# Altium PCB PCB.PcbDoc
Units mil, origin at the board's own origin, x right, y up, seen from the top; angles counter-clockwise.
Board outline 6000 x 4000 mil, 2 copper layers (Top Layer, Bottom Layer); 6 components, 5 nets, 24 pads, 0 vias.
Unrouted connection lines stored in the file: 7.
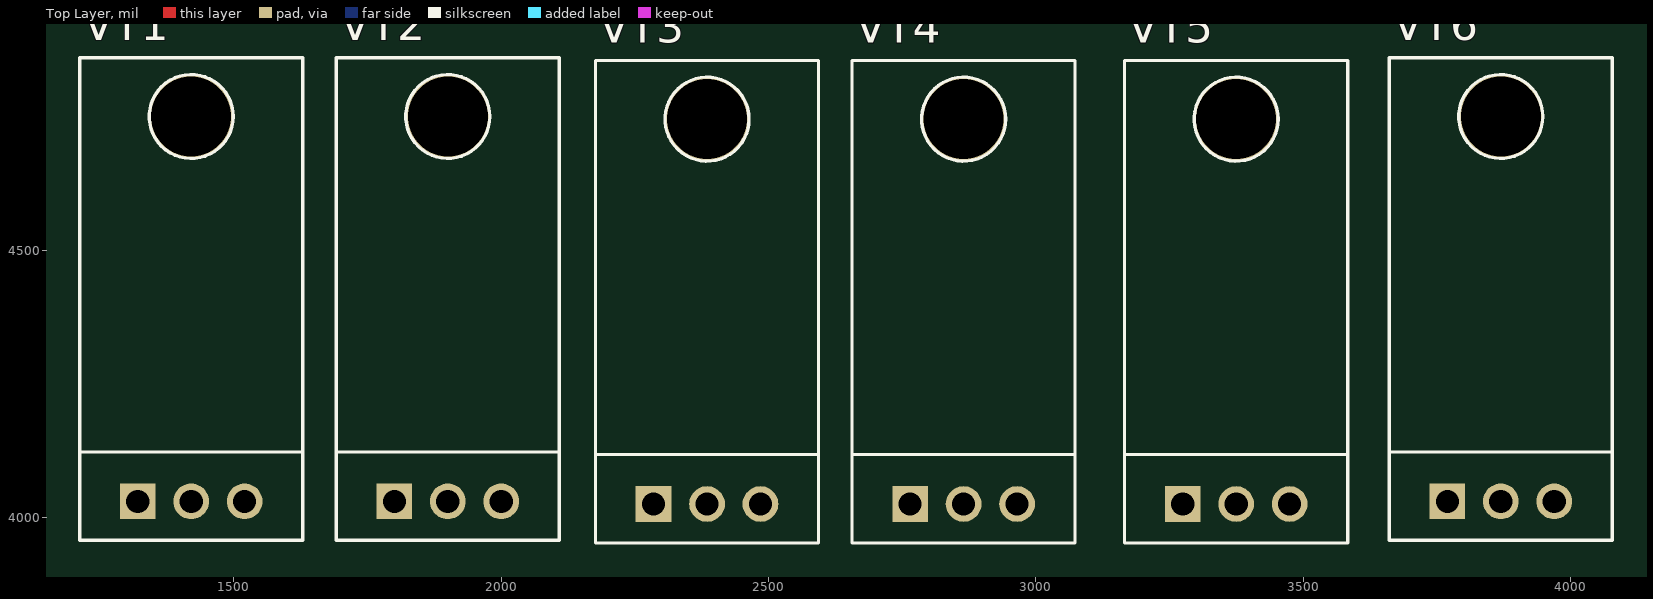
[diagram p0: Top Layer view]
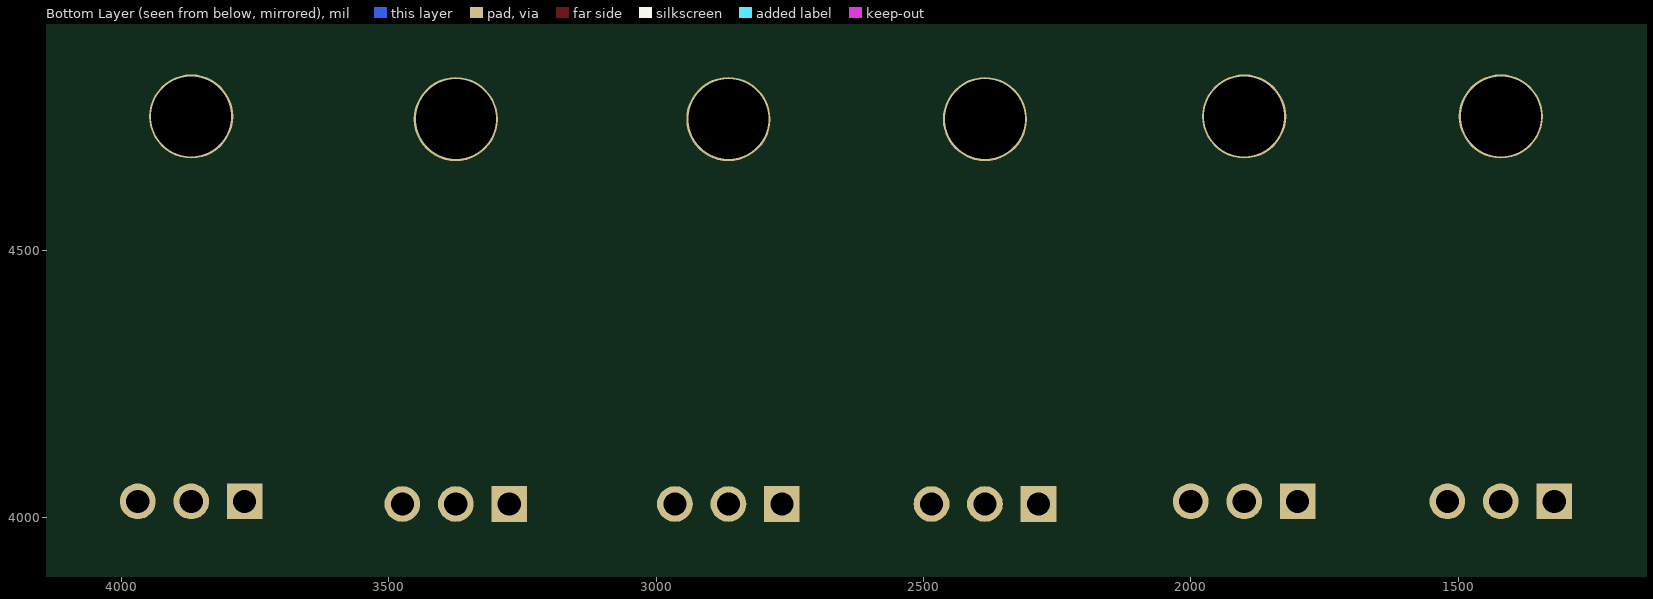
[diagram p1: Bottom Layer view, seen from below]

## Layer stack, top to bottom
Top Solder: solder mask 0.4, Solder Resist, Dk 3.5
Top Layer: signal copper 1.4
Dielectric 1: dielectric 12.6, FR-4, Dk 4.8
Bottom Layer: signal copper 1.4
Bottom Solder: solder mask 0.4, Solder Resist, Dk 3.5

## Board outline
1000,1000 7000,1000 7000,5000 1000,5000

## Design rules (kind name [scope] priority, off if disabled: settings)
Clearance [All] p1: gap=10 ignorepadtopadclearanceinfootprint=FALSE except(0: Arc-Hole Track-Hole SMDPad-Hole THPad-Hole Via-Hole Fill-Hole Poly-Hole Region-Hole Text-Hole)
PolygonConnect [All] p1: connectstyle=Relief reliefconductorwidth=10 reliefentries=4 polygonreliefangle="90 Angle" airgapwidth=10
RoomDefinition bridge [InComponentClass('bridge')] p1: confinementstyle=ConfineIn formatcopy=TRUE lockcomponents=FALSE outline 1000,2870 4180,2870 4180,5005 1000,5005
RoutingVias [All] p1: holewidth=28 width=50 viastyle="Through Hole" minholewidth=28 minwidth=50 maxholewidth=28 maxwidth=50
SolderMaskExpansion [All] p1: expansion=4 istentingtop=FALSE
Width [All] p1: maxlimit=10 minlimit=10 preferedwidth=10
30 further rules are at their usual default settings.

## Components (designator, comment, footprint, x,y, rotation, side; value= is the part's Value field where it differs from the comment)
VT1 "N-MOSFET" TO220AB 1420,4030 r0 top
VT2 "N-MOSFET" TO220AB 1900,4030 r0 top
VT3 "N-MOSFET" TO220AB 2385,4025 r0 top
VT4 "N-MOSFET" TO220AB 2865,4025 r0 top
VT5 "N-MOSFET" TO220AB 3375,4025 r0 top
VT6 "N-MOSFET" TO220AB 3870,4030 r0 top

## Footprints (in the part's own frame and the unit in brackets; to place one, negate y for a bottom-side part, rotate by r counter-clockwise, add the part's x,y. Pads: shape width x height; smd on the part's side, far side on the other; paste and mask are expansions set on the pad)
TO220AB [mm]
  rect 1.7x1.7 hole 1.1: 1(-2.54,0)
  round 1.7 hole 1.1: 2(0,0) 3(2.54,0)
  round 4 hole 3.8 unplated: 4(0,18.288)
  silkscreen extent -5.3,-1.85 5.3,21.08, body extent -5.2,-0.25 5.2,20.85, height 4.5

## Nets (pads, with @x,y where several pads share a name; then routed paths per layer and width w, separated by ;. In a path a pad name is that pad's centre, name@x,y a point inside that pad or via, vN(x,y) a via of type N, cw(c..) or ccw(c..) an arc to the next point about the centre after c; other vN are vias at no path point)
+VM: VT1.2 VT3.2 VT5.2
GND: VT2.3 VT4.3 VT6.3
NetVT1_S: VT1.3 VT2.2
NetVT3_S: VT3.3 VT4.2
NetVT5_S: VT5.3 VT6.2
pads on no net: VT1.1 VT1.4 VT2.1 VT2.4 VT3.1 VT3.4 VT4.1 VT4.4 VT5.1 VT5.4 VT6.1 VT6.4